# EAGLE board 24x16_RGB_cp (EAGLE 6.5.0), part 1 of 2
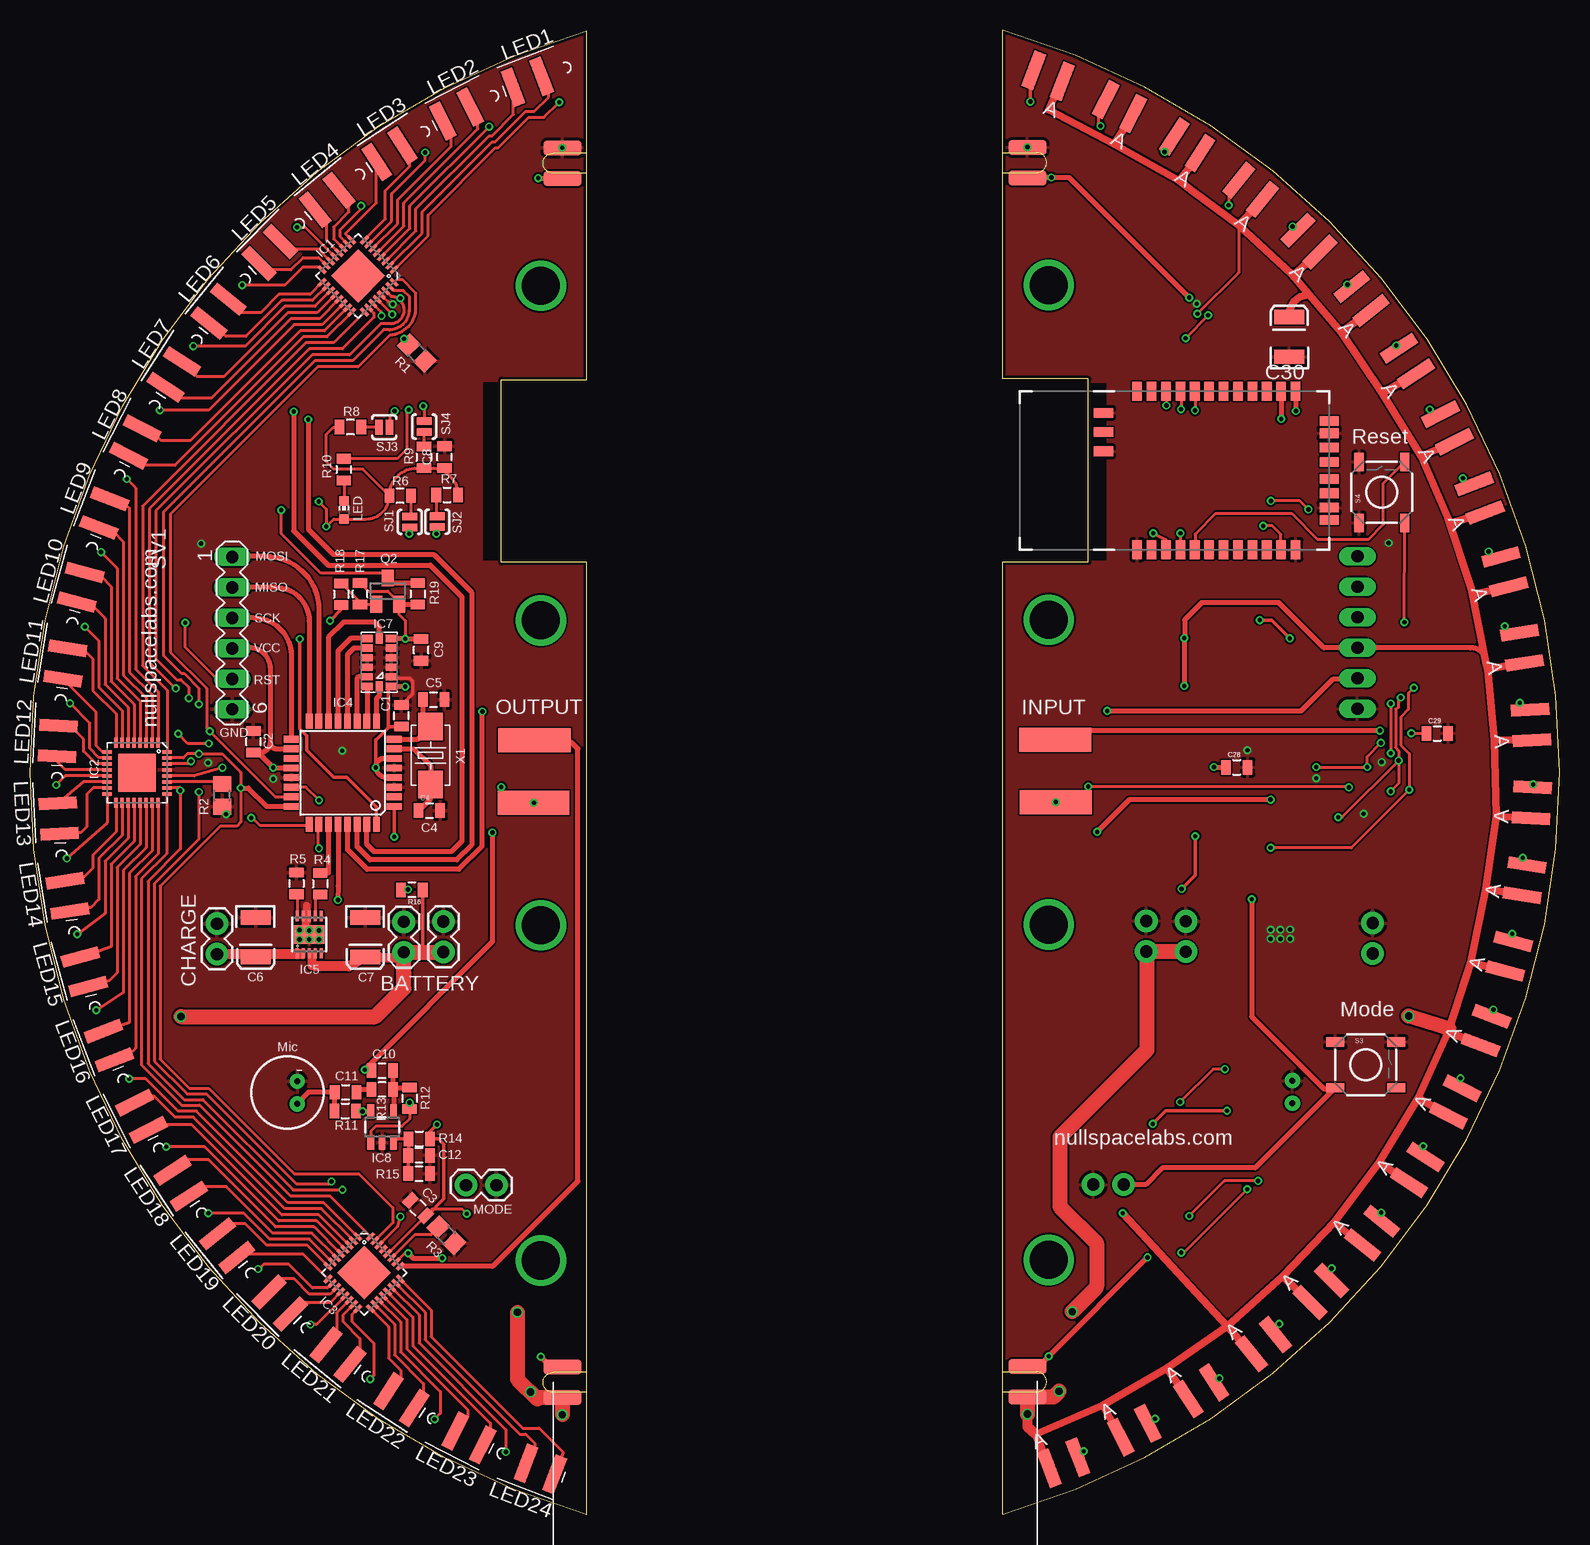
[diagram p0: board, top side]
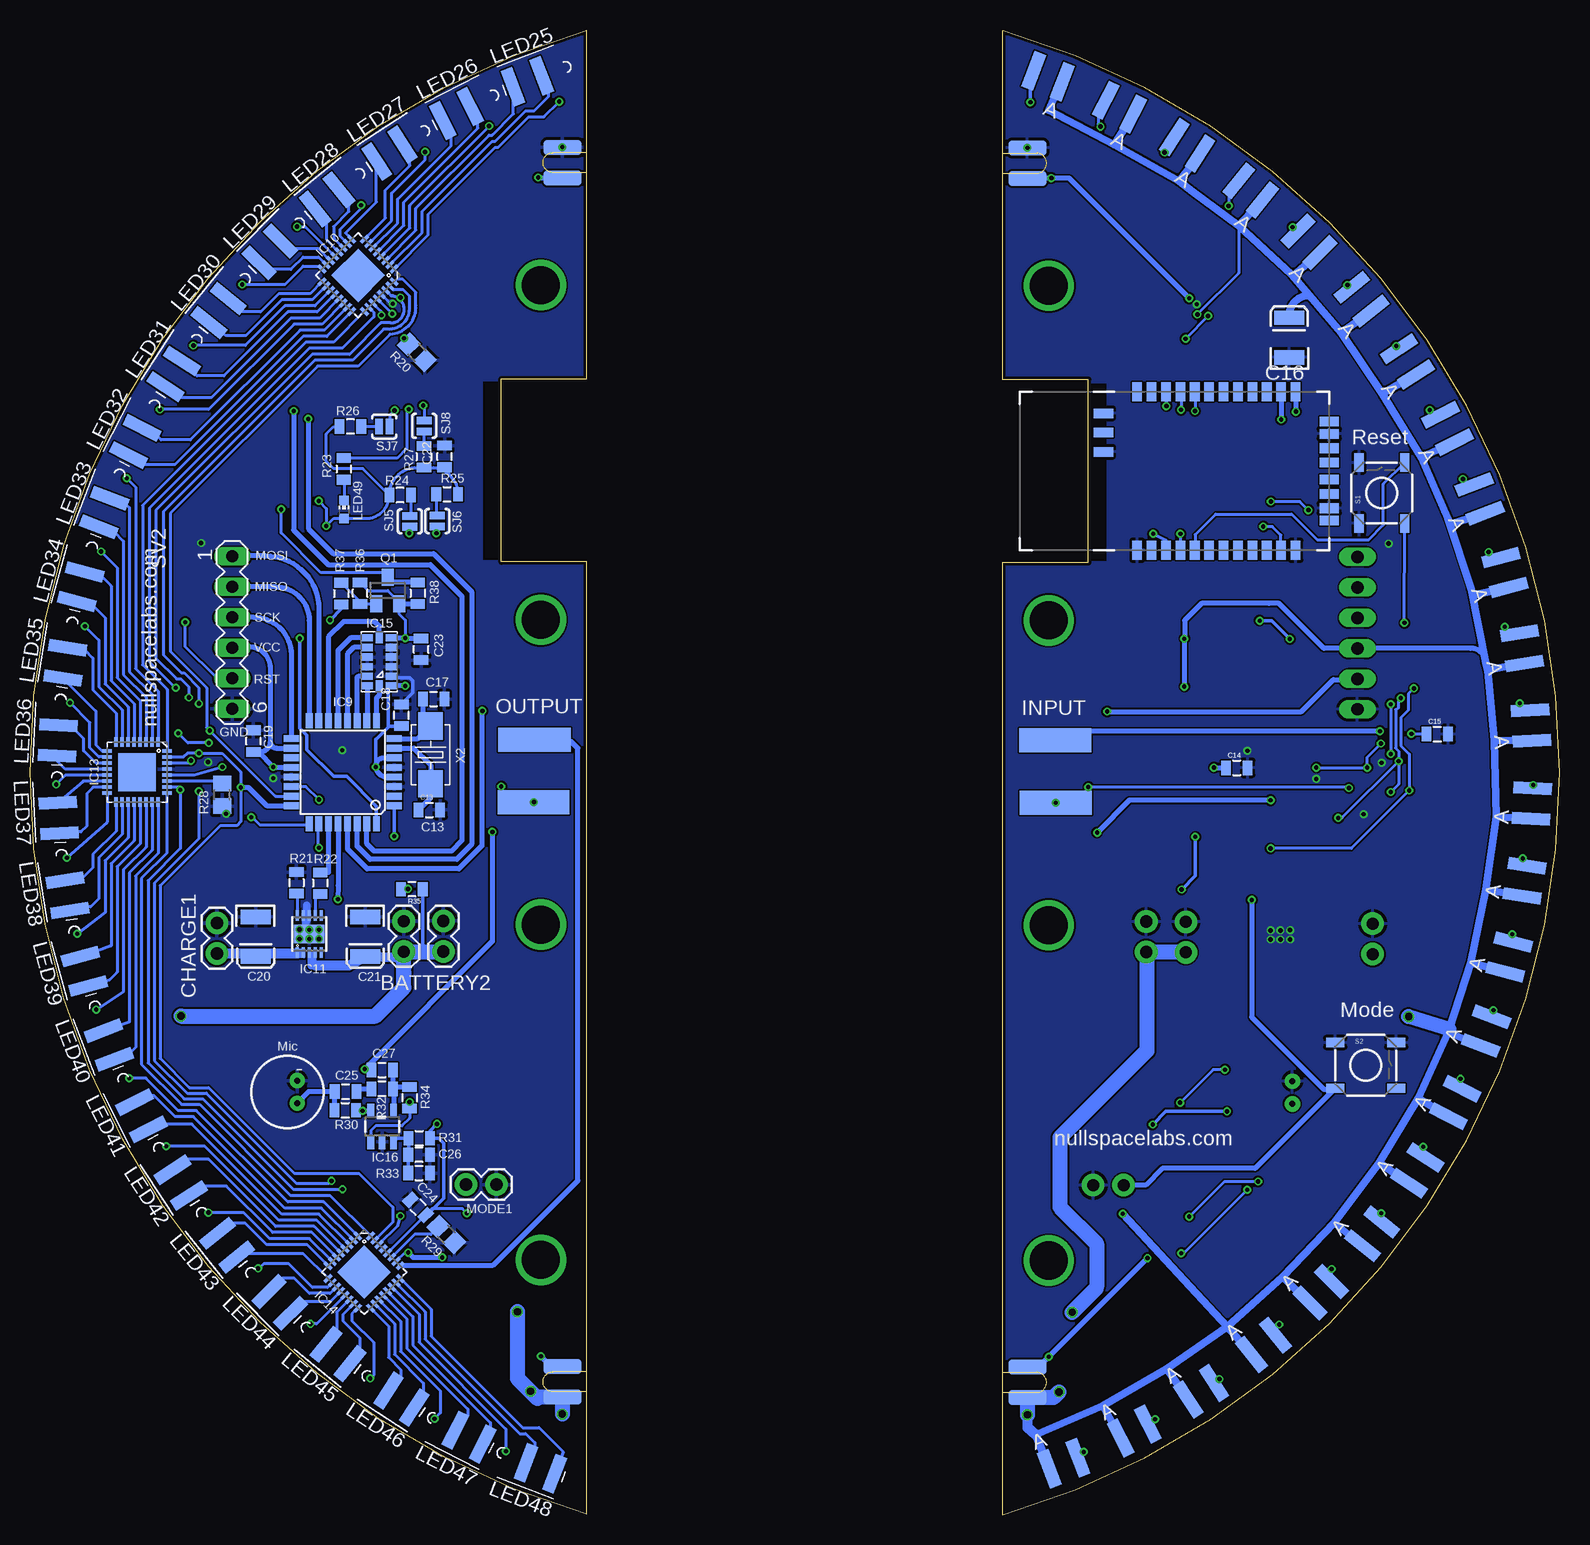
[diagram p1: board, bottom side, seen from below]

Size 127.47 x 123.75 mm. Coordinates in mm from the lower left corner, seen from the top.
Outline: 46.39,0 arc-147 46.39,123.7 46.39,94.61 39.27,94.61 39.27,79.38 46.39,79.38 46.39,0
Outline: 81.08,0.05 arc147 81.08,123.75 81.08,94.67 88.19,94.67 88.19,79.43 81.08,79.43 81.08,0.05
Copper layers (1*16): Top 0.035mm / dielectric 1.5mm / Bottom 0.035mm
Design rules "ITead_rule": minimum track width 6mil, minimum drill 12mil, track to track 6mil, track to pad 6mil, pad to pad 6mil, via to via 6mil, smd to smd 0mil, copper to edge 10mil, drill to drill 10mil, minimum pad ring 10mil, minimum via ring 6mil, stop-mask expansion 2mil, vias tented up to drill 100mil, thermal gap 10mil

## Footprints (pad centres in the part's own frame; a part is rotated, then mirrored left to right if it is on the bottom)
1X02 = drill 1.016 pad 1.88: 1 0,0; 2 2.54,0
0805 = smd 0.8 x 1.2: 1 -0.9,0; 2 0.9,0
EIA3528 = smd 1.2 x 2.5: A 1.65,0; C -1.65,0
QFN32_XLP = smd 0.285 x 0.8: 1 -1.75,-2.5; 2 -1.25,-2.5; 3 -0.75,-2.5; 4 -0.25,-2.5; 5 0.25,-2.5; 6 0.75,-2.5; 7 1.25,-2.5; 8 1.75,-2.5; 17 1.75,2.5; 18 1.25,2.5; 19 0.75,2.5; 20 0.25,2.5; 21 -0.25,2.5; 22 -0.75,2.5; 23 -1.25,2.5; 24 -1.75,2.5 | smd 0.8 x 0.285: 9 2.5,-1.75; 10 2.5,-1.25; 11 2.5,-0.75; 12 2.5,-0.25; 13 2.5,0.25; 14 2.5,0.75; 15 2.5,1.25; 16 2.5,1.75; 25 -2.5,1.75; 26 -2.5,1.25; 27 -2.5,0.75; 28 -2.5,0.25; 29 -2.5,-0.25; 30 -2.5,-0.75; 31 -2.5,-1.25; 32 -2.5,-1.75 | smd 3.15 x 3.15: EP 0,0
TQFP32-08 = smd 1.27 x 0.559: 1 -4.293,2.8; 2 -4.293,2; 3 -4.293,1.2; 4 -4.293,0.4; 5 -4.293,-0.4; 6 -4.293,-1.2; 7 -4.293,-2; 8 -4.293,-2.8; 17 4.293,-2.8; 18 4.293,-2; 19 4.293,-1.2; 20 4.293,-0.4; 21 4.293,0.4; 22 4.293,1.2; 23 4.293,2; 24 4.293,2.8 | smd 0.559 x 1.27: 9 -2.8,-4.293; 10 -2,-4.293; 11 -1.2,-4.293; 12 -0.4,-4.293; 13 0.4,-4.293; 14 1.2,-4.293; 15 2,-4.293; 16 2.8,-4.293; 25 2.8,4.293; 26 2,4.293; 27 1.2,4.293; 28 0.4,4.293; 29 -0.4,4.293; 30 -1.2,4.293; 31 -2,4.293; 32 -2.8,4.293
DFN10_3X3 = smd 0.3 x 0.85: 1 -1,-1.55; 2 -0.5,-1.55; 3 0,-1.55; 4 0.5,-1.55; 5 1,-1.55; 6 1,1.55; 7 0.5,1.55; 8 0,1.55; 9 -0.5,1.55; 10 -1,1.55 | smd 2.48 x 1.55: EXP 0,0
RN41 = smd 0.8 x 1.6: 1 -6.6,-6.6; 2 -5.4,-6.6; 3 -4.2,-6.6; 4 -3,-6.6; 5 -1.8,-6.6; 6 -0.6,-6.6; 7 0.6,-6.6; 8 1.8,-6.6; 9 3,-6.6; 10 4.2,-6.6; 11 5.4,-6.6; 12 6.6,-6.6; 13 6.6,6.6; 14 5.4,6.6; 15 4.2,6.6; 16 3,6.6; 17 1.8,6.6; 18 0.6,6.6; 19 -0.6,6.6; 20 -1.8,6.6; 21 -3,6.6; 22 -4.2,6.6; 23 -5.4,6.6; 24 -6.6,6.6 | smd 1.6 x 0.8: 25 -9.4,4.8; 26 -9.4,3.2; 27 -9.4,1.6; 28 9.4,3.1; 29 9.4,-3.1; 30 9.4,-4.122; 31 9.4,-1.9; 32 9.4,-0.7; 33 9.4,0.7; 34 9.4,1.9; 35 9.4,4.122
LGA-14 = smd 0.6 x 0.9: 1 -2,-1; 2 -1.2,-1; 3 -0.4,-1; 4 0.4,-1; 5 1.2,-1; 6 2,-1; 8 2,1; 9 1.2,1; 10 0.4,1; 11 -0.4,1; 12 -1.2,1; 13 -2,1 | smd 0.9 x 0.6: 7 2,0; 14 -2,0
SOT23-5 = smd 0.55 x 1.2: 1 -0.95,-1.3; 2 0,-1.3; 3 0.95,-1.3; 4 0.95,1.3; 5 -0.95,1.3
CHIP-LED0603 = smd 0.8 x 0.8: A 0,-0.75; C 0,0.75
LED5MM_RGB_EDGE = smd 1 x 3.175 bottom: A -0.585,-1.6; B 1.971,-1.6 | smd 1 x 3.175: G 0.693,-1.6; R -1.863,-1.6
MIC-6MM = drill 0.5 pad 1.27: 1 -0.8,0.95; 2 -0.8,-0.95
SOT23 = smd 1 x 1.4: 1 -0.95,-1.1; 2 0.95,-1.1; 3 0,1.1
R0805 = smd 1.3 x 1.5: 1 -0.95,0; 2 0.95,0
TACTILE_SWITCH_SMD = smd 1.524 x 0.762: 1 -2.54,1.905; 2 2.54,1.905; 3 -2.54,-1.905; 4 2.54,-1.905
SJ_2S-NO = smd 0.635 x 1.27: 1 -0.45,0; 2 0.45,0
SLOT = smd 3.175 x 1.27: P$1 2.032,1.27; P$2 2.032,-1.27 | smd 3.175 x 1.27 bottom: P$3 2.032,1.27; P$4 2.032,-1.27
MA06-1 = drill 1.016 long: 1 -6.35,0; 2 -3.81,0; 3 -1.27,0; 4 1.27,0; 5 3.81,0; 6 6.35,0
TP20SQ = smd 2 x 2: TP 0,0
5032 = smd 2.286 x 2.032: 1 -2.413,0; 2 2.413,0

## Placement (x,y rotation side)
BATTERY  [1X02]  31.15,49.43 270 top
BATTERY1  [1X02]  34.45,49.45 270 top
BATTERY2  [1X02]  96.32,49.48 270 bottom
BATTERY3  [1X02]  93.02,49.5 270 bottom
C1  .1uF  [0805]  30.94,66.6 90 top
C2  .1uF  [0805]  18.62,64.44 90 top
C3  .1uF  [0805]  32.34,25.59 135 top
C4  18pF  [0805]  33.28,58.7 0 top
C5  18pF  [0805]  33.64,67.94 0 top
C6  4.7uF  [EIA3528]  18.8,48.13 270 top
C7  4.7uF  [EIA3528]  27.95,48.13 270 top
C8  .1uF  [0805]  34.54,88.16 90 top
C9  0.1uF  [0805]  32.59,72.09 90 top
C10  100pF  [0805]  29.34,37.03 0 top
C11  .1uF  [0805]  26.3,35.23 0 top
C12  1uF  [0805]  32.42,29.97 180 top
C13  18pF  [0805]  94.19,58.75 0 bottom
C14  .1uF  [0805]  26.91,62.26 0 bottom
C15  .1uF  [0805]  10.19,65.07 0 bottom
C16  4.7uF  [EIA3528]  22.54,98.12 90 bottom
C17  18pF  [0805]  93.83,68 0 bottom
C18  .1uF  [0805]  96.53,66.65 90 bottom
C19  .1uF  [0805]  108.85,64.49 90 bottom
C20  4.7uF  [EIA3528]  108.67,48.18 270 bottom
C21  4.7uF  [EIA3528]  99.52,48.18 270 bottom
C22  .1uF  [0805]  92.93,88.21 90 bottom
C23  0.1uF  [0805]  94.88,72.14 90 bottom
C24  .1uF  [0805]  95.13,25.64 135 bottom
C25  .1uF  [0805]  101.17,35.28 0 bottom
C26  1uF  [0805]  95.05,30.02 180 bottom
C27  100pF  [0805]  98.13,37.08 0 bottom
C28  .1uF  [0805]  100.57,62.31 0 top
C29  .1uF  [0805]  117.28,65.13 0 top
C30  4.7uF  [EIA3528]  104.93,98.17 90 top
CHARGE  [1X02]  15.58,49.28 270 top
CHARGE1  [1X02]  111.89,49.33 270 bottom
IC1  TLC5947XLP  [QFN32_XLP]  27.34,103.25 135 top
IC2  TLC5947XLP  [QFN32_XLP]  8.92,61.85 180 top
IC3  TLC5947XLP  [QFN32_XLP]  27.84,20.19 225 top
IC4  MEGA8-AI  [TQFP32-08]  26.07,61.85 180 top
IC5  MCP73123  [DFN10_3X3]  23.27,48.36 0 top
IC6  BLUETOOTH-RN41"  [RN41]  28.61,87 0 bottom
IC7  MMA7455L  [LGA-14]  29.11,71.04 90 top
IC8  OPA344  [SOT23-5]  29.34,32.33 0 top
IC9  MEGA8-AI  [TQFP32-08]  101.4,61.9 180 bottom
IC10  TLC5947XLP  [QFN32_XLP]  100.13,103.3 135 bottom
IC11  MCP73123  [DFN10_3X3]  104.2,48.41 0 bottom
IC12  BLUETOOTH-RN41"  [RN41]  98.86,87.05 0 top
IC13  TLC5947XLP  [QFN32_XLP]  118.55,61.9 180 bottom
IC14  TLC5947XLP  [QFN32_XLP]  99.63,20.24 225 bottom
IC15  MMA7455L  [LGA-14]  98.36,71.09 90 bottom
IC16  OPA344  [SOT23-5]  98.13,32.38 0 bottom
LED  [CHIP-LED0603]  26.17,83.74 0 top
LED1  GM1WA55311A5MM_RGB_EDGE  [LED5MM_RGB_EDGE]  41.41,121.13 21 top
LED2  GM1WA55311A5MM_RGB_EDGE  [LED5MM_RGB_EDGE]  35.34,118.43 27 top
LED3  GM1WA55311A5MM_RGB_EDGE  [LED5MM_RGB_EDGE]  29.58,115.11 33 top
LED4  GM1WA55311A5MM_RGB_EDGE  [LED5MM_RGB_EDGE]  24.21,111.2 39 top
LED5  GM1WA55311A5MM_RGB_EDGE  [LED5MM_RGB_EDGE]  19.26,106.75 45 top
LED6  GM1WA55311A5MM_RGB_EDGE  [LED5MM_RGB_EDGE]  14.84,101.79 51 top
LED7  GM1WA55311A5MM_RGB_EDGE  [LED5MM_RGB_EDGE]  10.96,96.41 57 top
LED8  GM1WA55311A5MM_RGB_EDGE  [LED5MM_RGB_EDGE]  7.61,90.65 63 top
LED9  GM1WA55311A5MM_RGB_EDGE  [LED5MM_RGB_EDGE]  4.91,84.6 69 top
LED10  GM1WA55311A5MM_RGB_EDGE  [LED5MM_RGB_EDGE]  2.83,78.28 75 top
LED11  GM1WA55311A5MM_RGB_EDGE  [LED5MM_RGB_EDGE]  1.45,71.78 81 top
LED12  GM1WA55311A5MM_RGB_EDGE  [LED5MM_RGB_EDGE]  0.75,65.17 87 top
LED13  GM1WA55311A5MM_RGB_EDGE  [LED5MM_RGB_EDGE]  0.75,58.53 93 top
LED14  GM1WA55311A5MM_RGB_EDGE  [LED5MM_RGB_EDGE]  1.45,51.92 99 top
LED15  GM1WA55311A5MM_RGB_EDGE  [LED5MM_RGB_EDGE]  2.83,45.42 105 top
LED16  GM1WA55311A5MM_RGB_EDGE  [LED5MM_RGB_EDGE]  4.88,39.09 111 top
LED17  GM1WA55311A5MM_RGB_EDGE  [LED5MM_RGB_EDGE]  7.59,33.02 117 top
LED18  GM1WA55311A5MM_RGB_EDGE  [LED5MM_RGB_EDGE]  10.91,27.26 123 top
LED19  GM1WA55311A5MM_RGB_EDGE  [LED5MM_RGB_EDGE]  14.82,21.89 129 top
LED20  GM1WA55311A5MM_RGB_EDGE  [LED5MM_RGB_EDGE]  19.26,16.95 135 top
LED21  GM1WA55311A5MM_RGB_EDGE  [LED5MM_RGB_EDGE]  24.21,12.5 141 top
LED22  GM1WA55311A5MM_RGB_EDGE  [LED5MM_RGB_EDGE]  29.58,8.59 147 top
LED23  GM1WA55311A5MM_RGB_EDGE  [LED5MM_RGB_EDGE]  35.34,5.27 153 top
LED24  GM1WA55311A5MM_RGB_EDGE  [LED5MM_RGB_EDGE]  41.41,2.57 159 top
LED25  GM1WA55311A5MM_RGB_EDGE  [LED5MM_RGB_EDGE]  86.06,121.18 21 bottom
LED26  GM1WA55311A5MM_RGB_EDGE  [LED5MM_RGB_EDGE]  92.13,118.48 27 bottom
LED27  GM1WA55311A5MM_RGB_EDGE  [LED5MM_RGB_EDGE]  97.89,115.16 33 bottom
LED28  GM1WA55311A5MM_RGB_EDGE  [LED5MM_RGB_EDGE]  103.27,111.25 39 bottom
LED29  GM1WA55311A5MM_RGB_EDGE  [LED5MM_RGB_EDGE]  108.21,106.8 45 bottom
LED30  GM1WA55311A5MM_RGB_EDGE  [LED5MM_RGB_EDGE]  112.63,101.84 51 bottom
LED31  GM1WA55311A5MM_RGB_EDGE  [LED5MM_RGB_EDGE]  116.51,96.46 57 bottom
LED32  GM1WA55311A5MM_RGB_EDGE  [LED5MM_RGB_EDGE]  119.86,90.7 63 bottom
LED33  GM1WA55311A5MM_RGB_EDGE  [LED5MM_RGB_EDGE]  122.56,84.66 69 bottom
LED34  GM1WA55311A5MM_RGB_EDGE  [LED5MM_RGB_EDGE]  124.64,78.33 75 bottom
LED35  GM1WA55311A5MM_RGB_EDGE  [LED5MM_RGB_EDGE]  126.02,71.83 81 bottom
LED36  GM1WA55311A5MM_RGB_EDGE  [LED5MM_RGB_EDGE]  126.72,65.22 87 bottom
LED37  GM1WA55311A5MM_RGB_EDGE  [LED5MM_RGB_EDGE]  126.72,58.58 93 bottom
LED38  GM1WA55311A5MM_RGB_EDGE  [LED5MM_RGB_EDGE]  126.02,51.97 99 bottom
LED39  GM1WA55311A5MM_RGB_EDGE  [LED5MM_RGB_EDGE]  124.64,45.47 105 bottom
LED40  GM1WA55311A5MM_RGB_EDGE  [LED5MM_RGB_EDGE]  122.59,39.14 111 bottom
LED41  GM1WA55311A5MM_RGB_EDGE  [LED5MM_RGB_EDGE]  119.88,33.07 117 bottom
LED42  GM1WA55311A5MM_RGB_EDGE  [LED5MM_RGB_EDGE]  116.56,27.32 123 bottom
LED43  GM1WA55311A5MM_RGB_EDGE  [LED5MM_RGB_EDGE]  112.65,21.94 129 bottom
LED44  GM1WA55311A5MM_RGB_EDGE  [LED5MM_RGB_EDGE]  108.21,17 135 bottom
LED45  GM1WA55311A5MM_RGB_EDGE  [LED5MM_RGB_EDGE]  103.27,12.55 141 bottom
LED46  GM1WA55311A5MM_RGB_EDGE  [LED5MM_RGB_EDGE]  97.89,8.64 147 bottom
LED47  GM1WA55311A5MM_RGB_EDGE  [LED5MM_RGB_EDGE]  92.13,5.32 153 bottom
LED48  GM1WA55311A5MM_RGB_EDGE  [LED5MM_RGB_EDGE]  86.06,2.62 159 bottom
LED49  [CHIP-LED0603]  101.3,83.79 0 bottom
MIC1  MIC6MM  [MIC-6MM]  21.47,35.2 180 top
MIC2  MIC6MM  [MIC-6MM]  106,35.26 180 bottom
MODE  [1X02]  38.87,27.48 180 top
MODE1  [1X02]  88.6,27.53 180 bottom
Q1  BSH201  [SOT23]  97.67,77.04 0 bottom
Q2  BSH201  [SOT23]  29.8,76.99 0 top
R1  20K  [R0805]  32.24,96.83 135 top
R2  20K  [R0805]  16.01,59.97 90 top
R3  20K  [R0805]  34.69,23.32 135 top
R4  1K  [0805]  24.19,52.6 270 top
R5  1.5K  [0805]  22.21,52.63 270 top
R6  1k  [0805]  30.84,84.94 180 top
R7  1k  [0805]  34.75,85.01 0 top
R8  1k  [0805]  26.7,90.65 180 top
R9  1k  [0805]  32.82,88.14 270 top
R10  220  [0805]  26.14,87.12 270 top
R11  2.2k  [0805]  26.27,33.68 0 top
R12  100K  [0805]  31.63,34.72 270 top
R13  1k  [0805]  29.34,35.46 180 top
R14  10k  [0805]  32.44,31.34 0 top
R15  10k  [0805]  32.42,28.45 0 top
R16  220K  [0805]  31.83,52.1 180 top
R17  10k  [0805]  27.51,76.76 90 top
R18  10k  [0805]  25.94,76.73 270 top
R19  0ohm DNP  [0805]  32.32,76.76 270 top
R20  20K  [R0805]  95.23,96.88 135 bottom
R21  1.5K  [0805]  105.26,52.68 270 bottom
R22  1K  [0805]  103.28,52.65 270 bottom
R23  220  [0805]  101.33,87.17 270 bottom
R24  1k  [0805]  96.63,84.99 180 bottom
R25  1k  [0805]  92.72,85.06 0 bottom
R26  1k  [0805]  100.77,90.7 180 bottom
R27  1k  [0805]  94.65,88.19 270 bottom
R28  20K  [R0805]  111.46,60.02 90 bottom
R29  20K  [R0805]  92.78,23.37 135 bottom
R30  2.2k  [0805]  101.2,33.73 0 bottom
R31  10k  [0805]  95.03,31.39 0 bottom
R32  1k  [0805]  98.13,35.51 180 bottom
R33  10k  [0805]  95.05,28.5 0 bottom
R34  100K  [0805]  95.84,34.77 270 bottom
R35  220K  [0805]  95.64,52.15 180 bottom
R36  10k  [0805]  99.96,76.81 90 bottom
R37  10k  [0805]  101.53,76.78 270 bottom
R38  0ohm DNP  [0805]  95.15,76.81 270 bottom
S1  [TACTILE_SWITCH_SMD]  14.81,85.17 90 bottom
S2  [TACTILE_SWITCH_SMD]  16.16,37.46 0 bottom
S3  [TACTILE_SWITCH_SMD]  111.31,37.52 0 top
S4  [TACTILE_SWITCH_SMD]  112.66,85.22 90 top
SJ1  SOLDERJUMPERNO  [SJ_2S-NO]  31.65,82.75 90 top
SJ2  SOLDERJUMPERNO  [SJ_2S-NO]  33.94,82.78 90 top
SJ3  SOLDERJUMPERNO  [SJ_2S-NO]  29.52,90.65 180 top
SJ4  SOLDERJUMPERNO  [SJ_2S-NO]  32.85,90.7 270 top
SJ5  SOLDERJUMPERNO  [SJ_2S-NO]  95.82,82.8 90 bottom
SJ6  SOLDERJUMPERNO  [SJ_2S-NO]  93.53,82.83 90 bottom
SJ7  SOLDERJUMPERNO  [SJ_2S-NO]  97.95,90.7 180 bottom
SJ8  SOLDERJUMPERNO  [SJ_2S-NO]  94.62,90.75 270 bottom
SLOT1  SLOT  [SLOT]  46.39,11.05 180 top
SLOT2  SLOT  [SLOT]  46.39,112.65 180 top
SLOT3  SLOT  [SLOT]  81.08,11.1 180 bottom
SLOT4  SLOT  [SLOT]  81.08,112.7 180 bottom
SV1  [MA06-1]  16.85,73.48 270 top
SV2  [MA06-1]  110.62,73.53 270 bottom
TP1  TPTP20SQ  [TP20SQ]  42.04,64.57 0 top
TP2  TPTP20SQ  [TP20SQ]  40.04,64.57 0 top
TP3  TPTP20SQ  [TP20SQ]  41.97,59.36 0 top
TP4  TPTP20SQ  [TP20SQ]  39.99,59.36 0 bottom
TP5  TPTP20SQ  [TP20SQ]  42.04,64.57 0 bottom
TP6  TPTP20SQ  [TP20SQ]  40.04,64.57 0 bottom
TP7  TPTP20SQ  [TP20SQ]  43.97,59.36 0 bottom
TP8  TPTP20SQ  [TP20SQ]  41.99,59.36 0 bottom
TP9  TPTP20SQ  [TP20SQ]  44.05,64.57 0 top
TP10  TPTP20SQ  [TP20SQ]  39.99,59.36 0 top
TP11  TPTP20SQ  [TP20SQ]  44.05,64.57 0 bottom
TP12  TPTP20SQ  [TP20SQ]  43.95,59.36 0 top
TP13  TPTP20SQ  [TP20SQ]  85.43,64.62 0 bottom
TP14  TPTP20SQ  [TP20SQ]  87.43,64.62 0 bottom
TP15  TPTP20SQ  [TP20SQ]  85.5,59.41 0 bottom
TP16  TPTP20SQ  [TP20SQ]  87.48,59.41 0 top
TP17  TPTP20SQ  [TP20SQ]  85.43,64.62 0 top
TP18  TPTP20SQ  [TP20SQ]  87.43,64.62 0 top
TP19  TPTP20SQ  [TP20SQ]  83.5,59.41 0 top
TP20  TPTP20SQ  [TP20SQ]  85.48,59.41 0 top
TP21  TPTP20SQ  [TP20SQ]  83.42,64.62 0 bottom
TP22  TPTP20SQ  [TP20SQ]  87.48,59.41 0 bottom
TP23  TPTP20SQ  [TP20SQ]  83.42,64.62 0 top
TP24  TPTP20SQ  [TP20SQ]  83.52,59.41 0 bottom
X1  16Mhz  [5032]  33.38,63.3 270 top
X2  16Mhz  [5032]  94.09,63.35 270 bottom

## Library data of the parts
BATTERY BATTERY1-BATTERY3 C8-C12 C22 C23 C25-C27 CHARGE CHARGE1 IC8 IC16 R6-R15 R17-R19 R23-R27 R30-R34 R36-R38 S1-S4 SJ1-SJ8 = SparkFun
C1-C7 C13-C21 C24 C28-C30 IC1-IC3 IC10 IC13 IC14 MIC1 MIC2 R4 R5 R16 R21 R22 R35 = slice_noshift
IC4 IC9 = atmel; MPN: ATMEGA8-16AU; OC_FARNELL: 9171371; OC_NEWARK: 73M8863
IC5 IC11 LED1-LED48 MODE MODE1 = 24x16_RGB
IC6 IC12 = NSL_Mini_Quad
IC7 IC15 = MMA7455Lbreakoutboard-v1a
LED LED49 = led
Q1 Q2 = transistor-small-signal
R1-R3 R20 R28 R29 = rcl
SLOT1-SLOT4 = slice
SV1 SV2 = NSL
TP1-TP24 = testpad
X1 X2 = NSL_MiniQuad

## Nets
!CS: IC4.14 IC7.7
!CS1: IC9.14 IC15.7
BATTSENSE: IC4.1 R16.2
BATTSENSE1: IC9.1 R35.2
BLANK: IC1.30 IC2.30 IC3.30 IC4.25 SLOT2.P$1 SLOT2.P$3
BLANK1: IC9.25 IC10.30 IC13.30 IC14.30 SLOT4.P$1 SLOT4.P$3
BT_PWR: IC4.32 R18.2
BT_PWR1: IC9.32 R37.2
BT_RST: IC6.5 S1.4
BT_RST1: IC12.5 S4.4
BUTTON: IC4.28 MODE.2 S2.3
BUTTON1: IC9.28 MODE1.2 S3.3
CHARGE: C6.A CHARGE.2 IC5.1 IC5.2
CHARGE1: C20.A CHARGE1.2 IC11.1 IC11.2
COL1: IC1.1 LED1.B
COL2: IC1.2 LED1.G
COL3: IC1.3 LED1.R
COL4: IC1.4 LED2.B
COL5: IC1.5 LED2.G
COL6: IC1.6 LED2.R
COL7: IC1.7 LED3.B
COL8: IC1.8 LED3.G
COL9: IC1.9 LED3.R
COL10: IC1.10 LED4.B
COL11: IC1.11 LED4.G
COL12: IC1.12 LED4.R
COL13: IC1.13 LED5.B
COL14: IC1.14 LED5.G
COL15: IC1.15 LED5.R
COL16: IC1.16 LED6.B
COL17: IC1.17 LED6.G
COL18: IC1.18 LED6.R
COL19: IC1.19 LED7.B
COL20: IC1.20 LED7.G
COL21: IC1.21 LED7.R
COL22: IC1.22 LED8.B
COL23: IC1.23 LED8.G
COL24: IC1.24 LED8.R
COL25: IC2.1 LED9.B
COL26: IC2.2 LED9.G
COL27: IC2.3 LED9.R
COL28: IC2.4 LED10.B
COL29: IC2.5 LED10.G
COL30: IC2.6 LED10.R
COL31: IC2.7 LED11.B
COL32: IC2.8 LED11.G
COL33: IC2.9 LED11.R
COL34: IC2.10 LED12.B
COL35: IC2.11 LED12.G
COL36: IC2.12 LED12.R
COL37: IC2.13 LED13.B
COL38: IC2.14 LED13.G
COL39: IC2.15 LED13.R
COL40: IC2.16 LED14.B
COL41: IC2.17 LED14.G
COL42: IC2.18 LED14.R
COL43: IC2.19 LED15.B
COL44: IC2.20 LED15.G
COL45: IC2.21 LED15.R
COL46: IC2.22 LED16.B
COL47: IC2.23 LED16.G
COL48: IC2.24 LED16.R
COL49: IC3.1 LED17.B
COL50: IC3.2 LED17.G
COL51: IC3.3 LED17.R
COL52: IC3.4 LED18.B
COL53: IC3.5 LED18.G
COL54: IC3.6 LED18.R
COL55: IC3.7 LED19.B
COL56: IC3.8 LED19.G
COL57: IC3.9 LED19.R
COL58: IC3.10 LED20.B
COL59: IC3.11 LED20.G
COL60: IC3.12 LED20.R
COL61: IC3.13 LED21.B
COL62: IC3.14 LED21.G
COL63: IC3.15 LED21.R
COL64: IC3.16 LED22.B
COL65: IC3.17 LED22.G
COL66: IC3.18 LED22.R
COL67: IC3.19 LED23.B
COL68: IC3.20 LED23.G
COL69: IC3.21 LED23.R
COL70: IC3.22 LED24.B
COL71: IC3.23 LED24.G
COL72: IC3.24 LED24.R
COL73: IC10.2 LED25.G
COL74: IC10.4 LED26.B
COL75: IC10.5 LED26.G
COL76: IC10.7 LED27.B
COL77: IC10.8 LED27.G
COL78: IC10.10 LED28.B
COL79: IC10.11 LED28.G
COL80: IC10.13 LED29.B
COL81: IC10.14 LED29.G
COL82: IC10.17 LED30.G
COL83: IC10.19 LED31.B
COL84: IC10.20 LED31.G
COL85: IC10.23 LED32.G
COL86: IC10.22 LED32.B
COL87: IC10.16 LED30.B
COL88: IC10.1 LED25.B
COL89: IC10.3 LED25.R
COL90: IC10.6 LED26.R
COL91: IC10.9 LED27.R
COL92: IC10.12 LED28.R
COL93: IC10.15 LED29.R
COL94: IC10.18 LED30.R
COL95: IC10.21 LED31.R
COL96: IC10.24 LED32.R
COL97: IC13.3 LED33.R
COL98: IC13.1 LED33.B
COL99: IC13.2 LED33.G
COL100: IC13.4 LED34.B
COL101: IC13.5 LED34.G
COL102: IC13.6 LED34.R
COL103: IC13.7 LED35.B
COL104: IC13.8 LED35.G
COL105: IC13.9 LED35.R
COL106: IC13.10 LED36.B
COL107: IC13.11 LED36.G
COL108: IC13.12 LED36.R
COL109: IC13.13 LED37.B
COL110: IC13.14 LED37.G
COL111: IC13.15 LED37.R
COL112: IC13.16 LED38.B
COL113: IC13.17 LED38.G
COL114: IC13.18 LED38.R
COL115: IC13.19 LED39.B
COL116: IC13.20 LED39.G
COL117: IC13.21 LED39.R
COL118: IC13.22 LED40.B
COL119: IC13.23 LED40.G
COL120: IC13.24 LED40.R
COL121: IC14.1 LED41.B
COL122: IC14.2 LED41.G
COL123: IC14.4 LED42.B
COL124: IC14.3 LED41.R
COL125: IC14.5 LED42.G
COL126: IC14.6 LED42.R
COL127: IC14.7 LED43.B
COL128: IC14.8 LED43.G
COL129: IC14.9 LED43.R
COL130: IC14.10 LED44.B
COL131: IC14.11 LED44.G
COL132: IC14.12 LED44.R
COL133: IC14.13 LED45.B
COL134: IC14.14 LED45.G
COL135: IC14.15 LED45.R
COL136: IC14.16 LED46.B
COL137: IC14.17 LED46.G
COL138: IC14.18 LED46.R
COL139: IC14.19 LED47.B
COL140: IC14.20 LED47.G
COL141: IC14.21 LED47.R
COL142: IC14.22 LED48.B
COL143: IC14.23 LED48.G
COL144: IC14.24 LED48.R
GND: BATTERY1.1 BATTERY.1 C1.2 C2.2 C3.2 C4.2 C5.2 C6.C C7.C C8.2 C9.1 C12.1 C14.2 C15.2 C16.C CHARGE.1 IC1.29 IC2.29 IC3.29 IC4.3 IC4.5 IC4.21 IC5.8 IC5.9 IC5.EXP IC6.1 IC6.12 IC6.25 IC6.27 IC6.28 IC6.29 IC7.2 IC7.3 IC7.4 IC7.5 IC7.10 IC7.11 IC8.2 MIC1.2 MODE.1 R1.1 R2.1 R3.1 R5.1 R15.2 S1.1 S1.2 S2.1 S2.2 SLOT2.P$2 SLOT2.P$4 SV1.6
GND1: BATTERY2.1 BATTERY3.1 C13.2 C17.2 C18.2 C19.2 C20.C C21.C C22.2 C23.1 C24.2 C26.1 C28.2 C29.2 C30.C CHARGE1.1 IC9.3 IC9.5 IC9.21 IC10.29 IC11.8 IC11.9 IC11.EXP IC12.1 IC12.12 IC12.25 IC12.27 IC12.28 IC12.29 IC13.29 IC14.29 IC15.2 IC15.3 IC15.4 IC15.5 IC15.10 IC15.11 IC16.2 MIC2.2 MODE1.1 R20.1 R21.1 R28.1 R29.1 R33.2 S3.1 S3.2 S4.1 S4.2 SLOT4.P$2 SLOT4.P$4 SV2.6
HOLE: IC1.27 R1.2
HOLE1: IC10.27 R20.2
INT1: IC9.12 IC15.9
INT1/DRDY: IC4.13 IC7.8
INT1/DRDY1: IC9.13 IC15.8
INT2: IC4.12 IC7.9
MIC: C10.1 IC4.22 IC8.1 R12.2
MIC1: C27.1 IC9.22 IC16.1 R34.2
MISO: IC4.16 SV1.2
MISO1: IC9.16 SV2.2
MOSI: IC4.15 SV1.1
MOSI1: IC9.15 SV2.1
N$1: IC5.7 R4.2
N$2: IC2.27 R2.2
N$3: IC1.25 IC2.32
N$4: LED.C R10.2
N$5: R6.1 SJ1.2
N$6: IC5.10 R5.2
N$7: C4.1 IC4.7 X1.2
N$8: C5.1 IC4.8 X1.1
N$9: IC3.27 R3.2
N$14: C11.2 R13.2
N$15: C11.1 MIC1.1 R11.1
N$16: C12.2 IC8.3 R14.1 R15.1
N$17: C10.2 IC8.4 R12.1 R13.1
N$18: Q2.1 R17.1 R18.1
N$19: IC2.25 IC3.32
N$20: IC11.10 R21.2
N$21: R8.1 SJ3.2
N$22: IC11.7 R22.2
N$23: R7.1 SJ2.2
N$24: R9.1 SJ4.2
N$25: LED49.C R23.2
N$26: R26.1 SJ7.2
N$27: R24.1 SJ5.2
N$28: R25.1 SJ6.2
N$29: R27.1 SJ8.2
N$30: IC13.27 R28.2
N$31: IC10.25 IC13.32
N$32: IC14.27 R29.2
N$37: C25.2 R32.2
N$38: C25.1 MIC2.1 R30.1
N$39: C26.2 IC16.3 R31.1 R33.1
N$40: C27.2 IC16.4 R32.1 R34.1
N$41: Q1.1 R36.1 R37.1
N$42: C13.1 IC9.7 X2.2
N$43: C17.1 IC9.8 X2.1
N$44: IC13.25 IC14.32
PIO1: IC12.21 R23.1
PIO2: IC12.22 SJ8.1
PIO3: IC6.20 SJ3.1
PIO4: IC6.22 SJ4.1
PIO5: IC6.21 R10.1
PIO6: IC6.3 SJ2.1
PIO7: IC6.4 SJ1.1
PIO8: IC12.3 SJ6.1
PIO9: IC12.4 SJ5.1
PIO10: IC12.20 SJ7.1
RST: IC4.29 S1.3 SV1.5
RST1: IC9.29 S4.3 SV2.5
RX: IC4.30 IC6.14
RX1: IC9.30 IC12.14
SCK: IC4.17 SV1.3
SCK1: IC9.17 SV2.3
SCL/SPC: IC4.10 IC7.13
SCL/SPC1: IC9.10 IC15.13
SCLK: IC1.31 IC2.31 IC3.31 IC4.24 TP3.TP TP4.TP TP7.TP TP8.TP TP10.TP TP12.TP
SCLK1: IC9.24 IC10.31 IC13.31 IC14.31 TP15.TP TP16.TP TP19.TP TP20.TP TP22.TP TP24.TP
SDA/SDI/SDO: IC4.11 IC7.12
SDA/SDI/SDO1: IC9.11 IC15.12
SDO: IC4.9 IC7.14
SDO1: IC9.9 IC15.14
SIN: IC1.32 IC4.23 TP5.TP TP6.TP TP11.TP
SIN1: IC9.23 IC10.32 TP17.TP TP18.TP TP23.TP
SOUT: IC3.25 TP1.TP TP2.TP TP9.TP
SOUT1: IC14.25 TP13.TP TP14.TP TP21.TP
STAT: IC4.27 R4.1
STAT1: IC9.27 R22.1
TX: IC4.31 IC6.13
TX1: IC9.31 IC12.13
VCC: BATTERY1.2 BATTERY.2 C1.1 C2.1 C3.1 C7.A C9.2 C14.1 C15.1 C16.A IC1.28 IC2.28 IC3.28 IC4.4 IC4.6 IC4.18 IC4.20 IC5.3 IC5.4 IC7.1 IC7.6 IC8.5 LED1.A LED2.A LED3.A LED4.A LED5.A LED6.A LED7.A LED8.A LED9.A LED10.A LED11.A LED12.A LED13.A LED14.A LED15.A LED16.A LED17.A LED18.A LED19.A LED20.A LED21.A LED22.A LED23.A LED24.A Q2.2 R11.2 R14.2 R16.1 R17.2 R19.2 SLOT1.P$1 SLOT1.P$3 SV1.4
VCC1: BATTERY2.2 BATTERY3.2 C18.1 C19.1 C21.A C23.2 C24.1 C28.1 C29.1 C30.A IC9.4 IC9.6 IC9.18 IC9.20 IC10.28 IC11.3 IC11.4 IC13.28 IC14.28 IC15.1 IC15.6 IC16.5 LED25.A LED26.A LED27.A LED28.A LED29.A LED30.A LED31.A LED32.A LED33.A LED34.A LED35.A LED36.A LED37.A LED38.A LED39.A LED40.A LED41.A LED42.A LED43.A LED44.A LED45.A LED46.A LED47.A LED48.A Q1.2 R30.2 R31.2 R35.1 R36.2 R38.2 SLOT3.P$1 SLOT3.P$3 SV2.4
VDD: C8.1 IC6.11 LED.A Q2.3 R6.2 R7.2 R8.2 R9.2 R19.1
VDD1: C22.1 IC12.11 LED49.A Q1.3 R24.2 R25.2 R26.2 R27.2 R38.1
VSENSE: IC4.19
VSENSE1: IC9.19
XLAT: IC1.26 IC2.26 IC3.26 IC4.26 SLOT1.P$2 SLOT1.P$4
XLAT1: IC9.26 IC10.26 IC13.26 IC14.26 SLOT3.P$2 SLOT3.P$4